# EAGLE board projeto_tinker_cad (EAGLE 7.6.0)

Size 73.58 x 63.39 mm. Coordinates in mm from the lower left corner, seen from the top.
Outline: 0,0 56.82,0 56.82,53.33 0,53.33 0,0
Copper layers (1*16): Top 0.035mm / dielectric 1.5mm / Bottom 0.035mm
Design rules "default": minimum track width 10mil, minimum drill 24mil, track to track 8mil, track to pad 8mil, pad to pad 8mil, via to via 8mil, smd to smd 8mil, copper to edge 40mil, drill to drill 8mil, minimum pad ring 10mil, minimum via ring 8mil, stop-mask expansion 4mil, vias tented up to drill 0mil, thermal gap 10mil

## Footprints (pad centres in the part's own frame; a part is rotated, then mirrored left to right if it is on the bottom)
LED5MM = drill 0.813 octagon: A -1.27,0; K 1.27,0
PIEZO-22MM = drill 1 pad 2.54: P$1 -5,0; P$2 5,0
0207/10 = drill 0.813 octagon: 1 -5.08,0; 2 5.08,0
TL1105 = drill 1 pad 1.676: 1 -2.25,3.25; 2 2.25,3.25; 3 -2.25,-3.25; 4 2.25,-3.25
ARDUINO_UNO = drill 1.016 pad 1.88: 0 63.5,50.8; 1 60.96,50.8; 2 58.42,50.8; 3 55.88,50.8; 3.3V 35.56,2.54; 4 53.34,50.8; 5 50.8,50.8; 5V 38.1,2.54; 6 48.26,50.8; 7 45.72,50.8; 8 41.656,50.8; 9 39.116,50.8; 10 36.576,50.8; 11 34.036,50.8; 12 31.496,50.8; 13 28.956,50.8; A0 50.8,2.54; A1 53.34,2.54; A2 55.88,2.54; A3 58.42,2.54; A4 60.96,2.54; A5 63.5,2.54; AREF 23.876,50.8; GND 26.416,50.8; GND. 43.18,2.54; GND.. 40.64,2.54; I/OREF 30.48,2.54; N/C 27.94,2.54; RESET 33.02,2.54; SCL 18.796,50.8; SDA 21.336,50.8; VIN 45.72,2.54 | hole 3.2: 66.04,7.62; 66.04,35.56; 15.24,50.8; 13.97,2.54

## Placement (x,y rotation side)
DL_AZUL  [LED5MM]  5,111.68 0 top  (outside the outline)
DL_BRANCO  [LED5MM]  5,73.58 0 top  (outside the outline)
DL_Orange  [LED5MM]  5,98.98 0 top  (outside the outline)
DL_Yellow  [LED5MM]  5,86.28 0 top  (outside the outline)
PIEZO1  [PIEZO-22MM]  5,175.18 0 top  (outside the outline)
R2  220‎Ω  [0207/10]  5,22.78 0 top
R3  220‎Ω  [0207/10]  5,35.48 0 top
R4  220‎Ω  [0207/10]  5,48.18 0 top
R5  220‎Ω  [0207/10]  5,60.88 0 top
SB_AMARELO  [TL1105]  5,137.08 0 top  (outside the outline)
SB_AZUL  [TL1105]  5,162.48 0 top  (outside the outline)
SB_LARANJA  [TL1105]  5,149.78 0 top  (outside the outline)
SB_Yellow  [TL1105]  5,124.38 0 top  (outside the outline)
U1  [ARDUINO_UNO]  5,10.08 0 top

## Library data of the parts
DL_AZUL DL_BRANCO DL_Orange DL_Yellow PIEZO1 R2-R5 SB_AMARELO SB_AZUL SB_LARANJA SB_Yellow U1 = AUTODESK_CIRCUITS_BREADBOARD

## Nets
N$1: SB_Yellow.2
N$2: SB_Yellow.1
N$3: SB_Yellow.3 U1.3
N$4: DL_Yellow.K R2.2
N$5: DL_AZUL.K R3.2
N$6: SB_AZUL.2
N$7: SB_AZUL.1
N$8: SB_AZUL.3 U1.4
N$9: DL_Orange.K R4.2
N$10: DL_Orange.A U1.10
N$11: PIEZO1.P$2 R2.1 R3.1 R4.1 R5.1 SB_AMARELO.4 SB_AZUL.4 SB_LARANJA.4 SB_Yellow.4 U1.GND..
N$12: SB_LARANJA.2
N$13: SB_LARANJA.1
N$14: SB_LARANJA.3 U1.5
N$15: DL_BRANCO.K R5.2
N$16: SB_AMARELO.2
N$17: SB_AMARELO.1
N$18: SB_AMARELO.3 U1.6
N$19: DL_AZUL.A U1.9
N$20: DL_Yellow.A U1.8
N$21: DL_BRANCO.A U1.11
N$22: PIEZO1.P$1 U1.7

## Tracks (layer width: path | path; a pad name or v marks a point on that pad's centre or on a via)
N$3  (1 unrouted)
N$4  (1 unrouted)
N$5  (1 unrouted)
N$8  (1 unrouted)
N$9  (1 unrouted)
N$10  (1 unrouted)
N$11  (9 unrouted)
N$14  (1 unrouted)
N$15  (1 unrouted)
N$18  (1 unrouted)
N$19  (1 unrouted)
N$20  (1 unrouted)
N$21  (1 unrouted)
N$22  (1 unrouted)